# Altium PCB 模拟光伏追踪系统约束条件线路板.PcbDoc
Units mil, origin at the board's own origin, x right, y up, seen from the top; angles counter-clockwise.
Board outline 5290 x 3570 mil, 2 copper layers (Top Layer, Bottom Layer); 3 components, 149 nets, 10 pads, 0 vias.
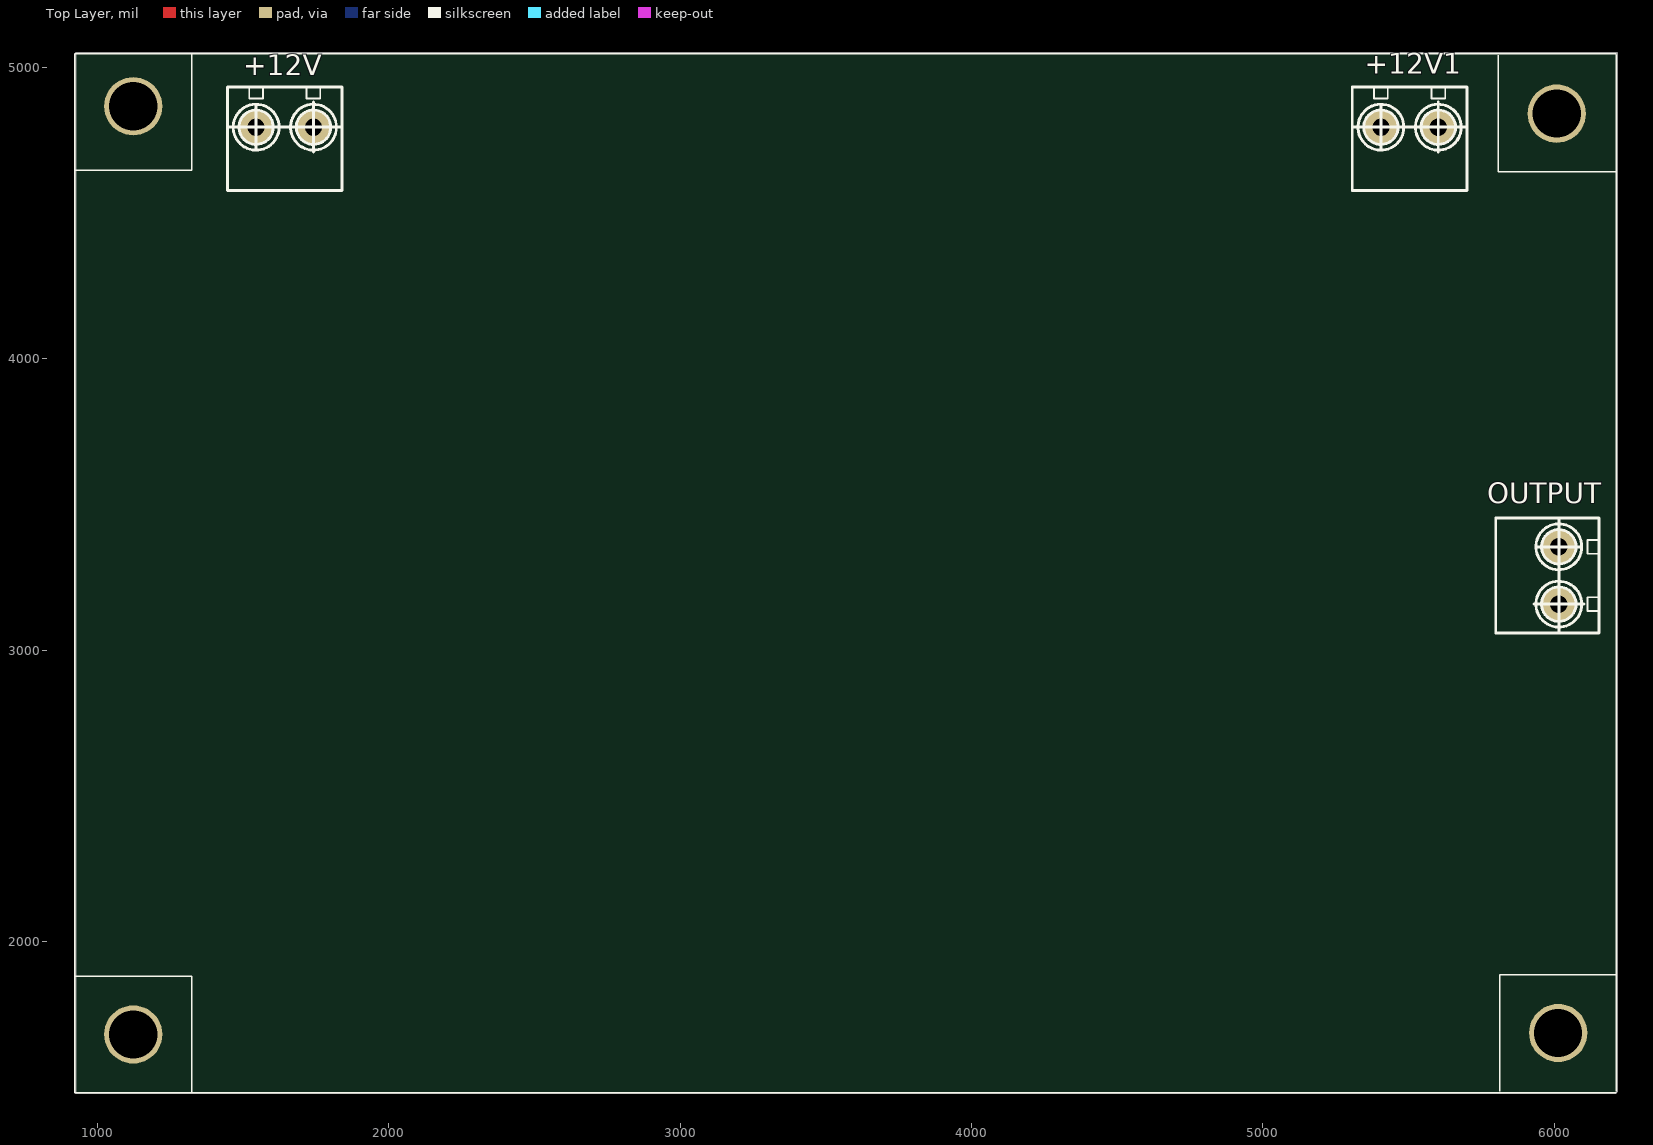
[diagram p0: Top Layer view]
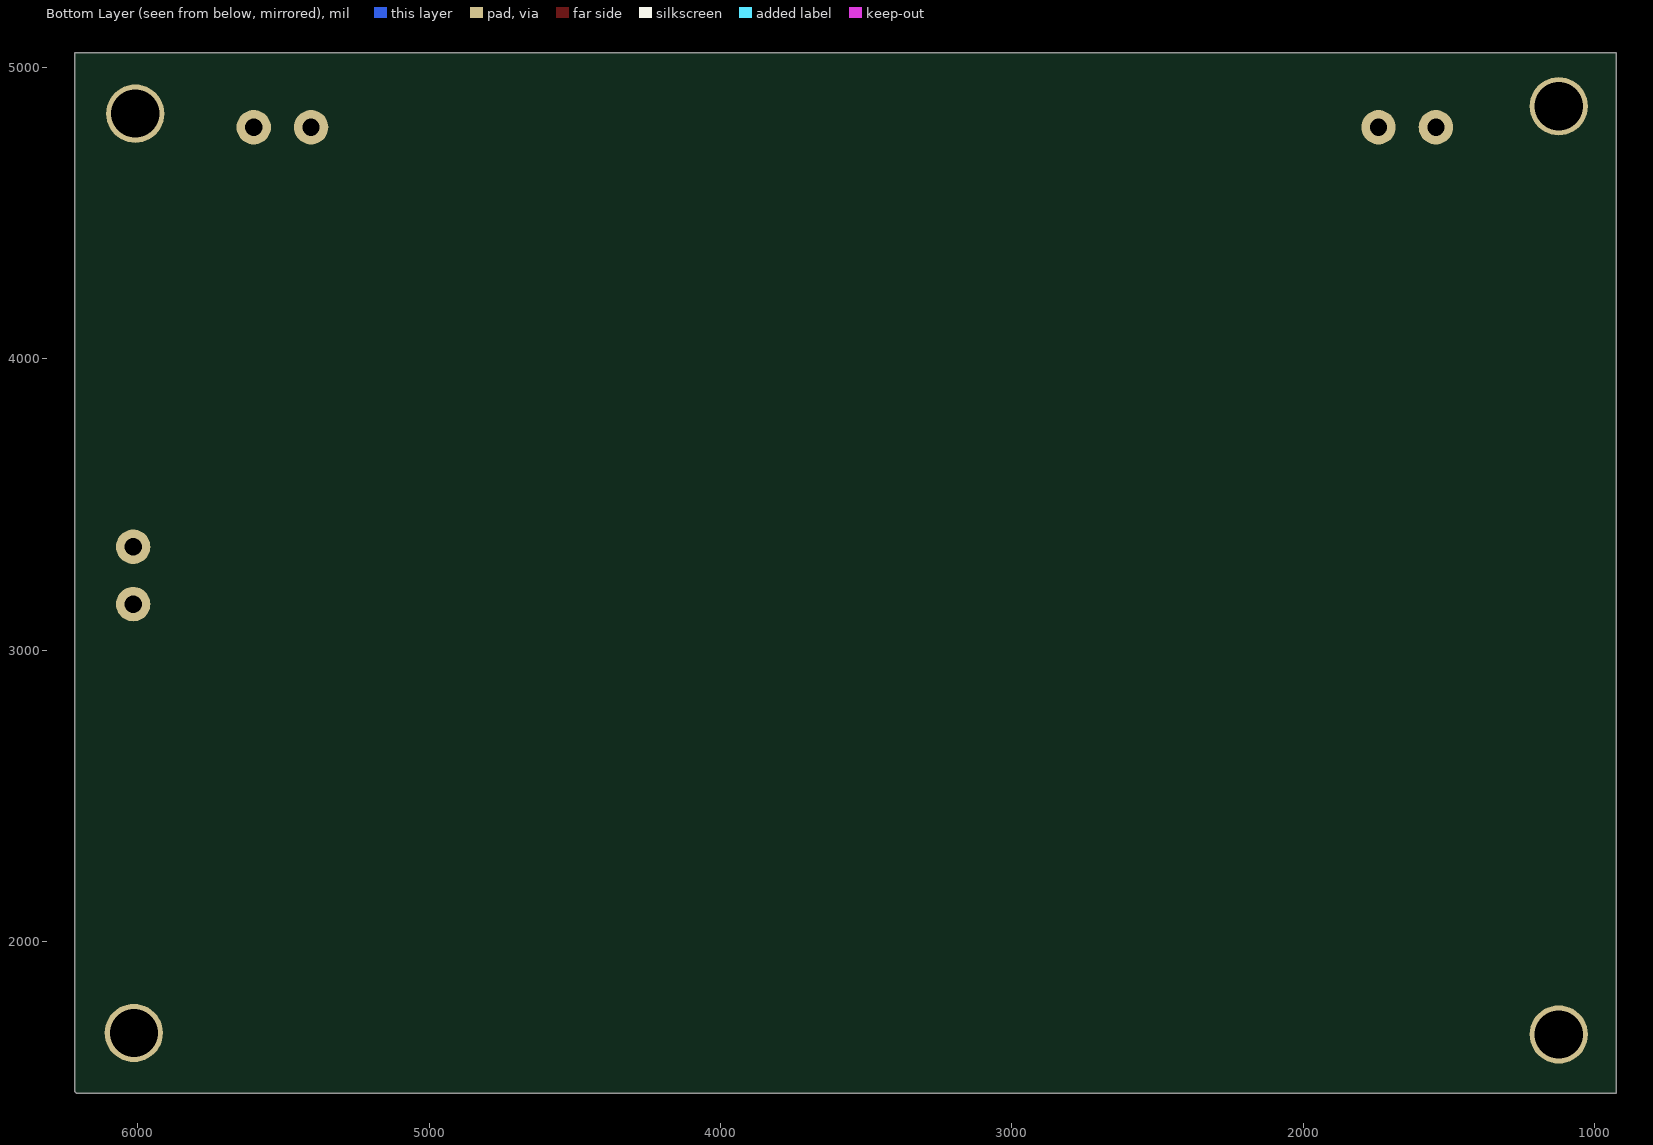
[diagram p1: Bottom Layer view, seen from below]

## Layer stack, top to bottom
Top Layer: signal copper 1.4
Dielectric: dielectric 12.6, FR-4, Dk 4.8
Bottom Layer: signal copper 1.4

## Board outline
925,5050 6215,5050 6215,1485 6210,1480 925,1480

## Design rules (kind name [scope] priority, off if disabled: settings)
Clearance [All] p1: gap=8
PolygonConnect [All] p1: connectstyle=Relief reliefconductorwidth=10 reliefentries=4 polygonreliefangle="90 Angle"
RoutingVias [All] p1: holewidth=28 width=50 viastyle="Through Hole" minholewidth=28 minwidth=50 maxholewidth=28 maxwidth=50
SilkscreenOverComponentPads [All] p1: minsilkscreentomaskgap=10
SolderMaskExpansion [All] p1: expansion=4
TestPointUsage [All] p1: valid=0 allowmultiple=FALSE
Testpoint [All] p1: side=15 testpointundercomponent=TRUE minsize=40 maxsize=100 preferedsize=60 minholesize=0 maxholesize=40 preferedholesize=32 testpointgrid=1 style=1023 order=0-112345678
Width [All] p1: maxlimit=10 minlimit=10 preferedwidth=10
23 further rules are at their usual default settings.

## Components (designator, comment, footprint, x,y, rotation, side; value= is the part's Value field where it differs from the comment)
+12V "Comment" 接线端子 1640,4780 r90 top (schematic designator J3)
+12V1 "Comment" 接线端子 5500,4780 r90 top (schematic designator J1)
OUTPUT "Comment" 接线端子 6000,3260 r0 top (schematic designator J2)

## Footprints (in the part's own frame and the unit in brackets; to place one, negate y for a bottom-side part, rotate by r counter-clockwise, add the part's x,y. Pads: shape width x height; smd on the part's side, far side on the other; paste and mask are expansions set on the pad)
接线端子 [mm]
  round 3 hole 1.5: 1(0.386,-2.58) 2(0.386,2.42)
  silkscreen extent -5.11,-5.08 3.89,4.92

## Part data
+12V +12V1 OUTPUT: library part "Header 2", "Header, 2-Pin"

## Free pads (board coordinates)
  round 200 hole 165: 0(1123,1681.84) 0(1123,4867.16) 0(6008,4841.84) 0(6013,1686.84)

## Nets (pads, with @x,y where several pads share a name; then routed paths per layer and width w, separated by ;. In a path a pad name is that pad's centre, name@x,y a point inside that pad or via, vN(x,y) a via of type N, cw(c..) or ccw(c..) an arc to the next point about the centre after c; other vN are vias at no path point)
232-RXD: 
232-TXD: 
485-DE: 
485-RXD: 
485-TXD: 
+3.3V: 
+3.3V1: 
+12V: +12V.1
+12V1: +12V1.1
/FAULT: 
/OTW: 
/RESET: 
/RST: 
AIN0: 
AIN1: 
AIN2: 
AIN3: 
BST-C: 
BST-D: 
BTN0: 
BTN1: 
BUZZER: 
FLASH-/CS: 
FLASH-CLK: 
FLASH-SIMO: 
FLASH-SOMI: 
GND: +12V.2
GND1: +12V1.2
JA0-A0: 
JA1-A1: 
JA2-A2: 
JA3-A3: 
JA4-A4: 
JA5-A5: 
JA6-A6: 
JA7-A7: 
JB0-CLK: 
JB1-SOMI: 
JB2-SIMO: 
JB3-TA0.0: 
JB4-TA0.1: 
JB5-TA0.2: 
JB6-TA0.3: 
JB7-TA0.4: 
JC0: 
JC1: 
JC2: 
JC3: 
JC4: 
JC5: 
JC6: 
JC7: 
JD0: 
JD1: 
JD2: 
JD3: 
JD4: 
JD5: 
JD6: 
JD7: 
JE0-CLK: 
JE1-SOMI: 
JE2-SIMO: 
JE3: 
JE4: 
JE5: 
JE6: 
JE7: 
JF0-CLK: 
JF1-SOMI: 
JF2-SIMO: 
JF3: 
JF4: 
JF5-TA1.0: 
JF6-TA1.1: 
JF7-TA1.2: 
JG0-TB0.0: 
JG1-TB0.1: 
JG2-TB0.2: 
JG3-TB0.3: 
JG4-TB0.4: 
JG5-TB0.5: 
JG6-TB0.6: 
JG7: 
LED0: 
LED1: 
M1: 
M2: 
M3: 
NetC12_1: 
NetC15_2: 
NetC17_1: 
NetC25_1: 
NetC30_2: 
NetC40_2: 
NetLED1_1: 
NetLED2_1: 
NetLED3_1: 
NetLED4_1: 
NetLED5_1: 
NetQ1_1: 
NetQ1_2: 
NetQ2_1: 
NetQ2_2: 
NetR9_1: 
NetR9_2: 
NetR11_1: 
NetR21_1: 
NetR22_1: 
NetR23_1: 
NetR24_1: 
NetR29_1: 
NetR30_2: 
NetR31_1: 
NetR32_2: 
NetR33_1: 
NetR33_2: 
NetR34_2: 
NetR36_1: 
OUTC: OUTPUT.2
OUTD: OUTPUT.1
PWM-C: 
PWM-D: 
TCK: 
TDI: 
TDO: 
TEST: 
TMS: 
UDP-/CS: 
UDP-/INT: 
UDP-/RST: 
UDP-/WOL: 
UDP-SCK: 
UDP-SIMO: 
UDP-SOMI: 
USB-RXD: 
USB-TXD: 
V1: 
V2: 
V3: 
V4: 
VCORE: 
VIN: 
VPH: 
VREG: 
XIN: 
XOUT: 
XT2IN: 
XT2OUT: 

## Silkscreen, mask and mechanical layers (free items; w line width, h text height)
Top Overlay:
  lines w5: 923,1881.84 1323,1881.84 1323,1481.84 ; 923,4646.84 1323,4646.84 1323,5046.84 ; 5808,5041.84 5808,4641.84 6208,4641.84 ; 5813,1486.84 5813,1886.84 6213,1886.84 ; 6212.6,1481.84 923,1481.84 923,5047.24 6212.6,5047.24 ; 6213,1486.84 6213,5044.37